# Altium PCB ESCV2.PcbDoc
Units mm, origin at the board's own origin, x right, y up, seen from the top; angles counter-clockwise.
Board outline 38.86 x 29.46 mm, 2 copper layers (L1, L2), stack 1.671 mm thick; 59 components, 37 nets, 154 pads, 23 vias.
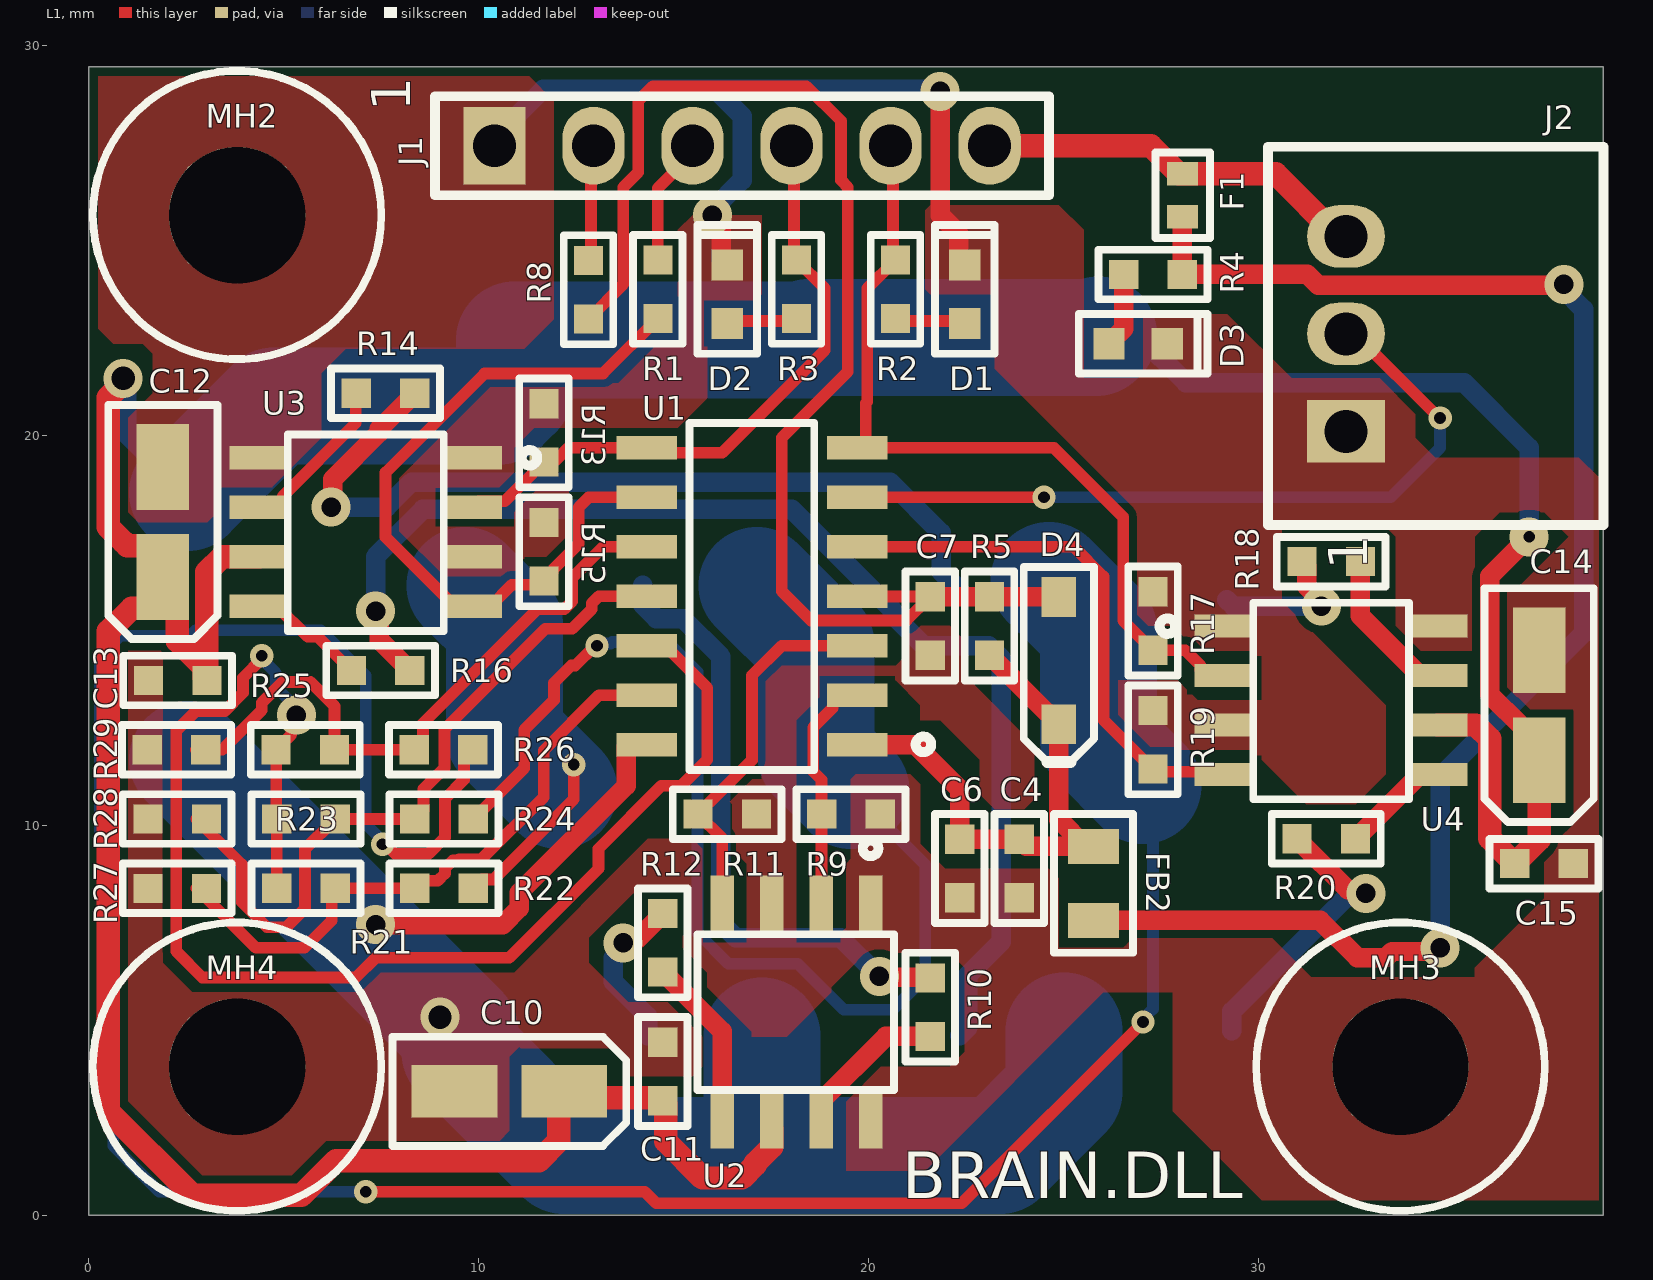
[diagram p0: L1 view]
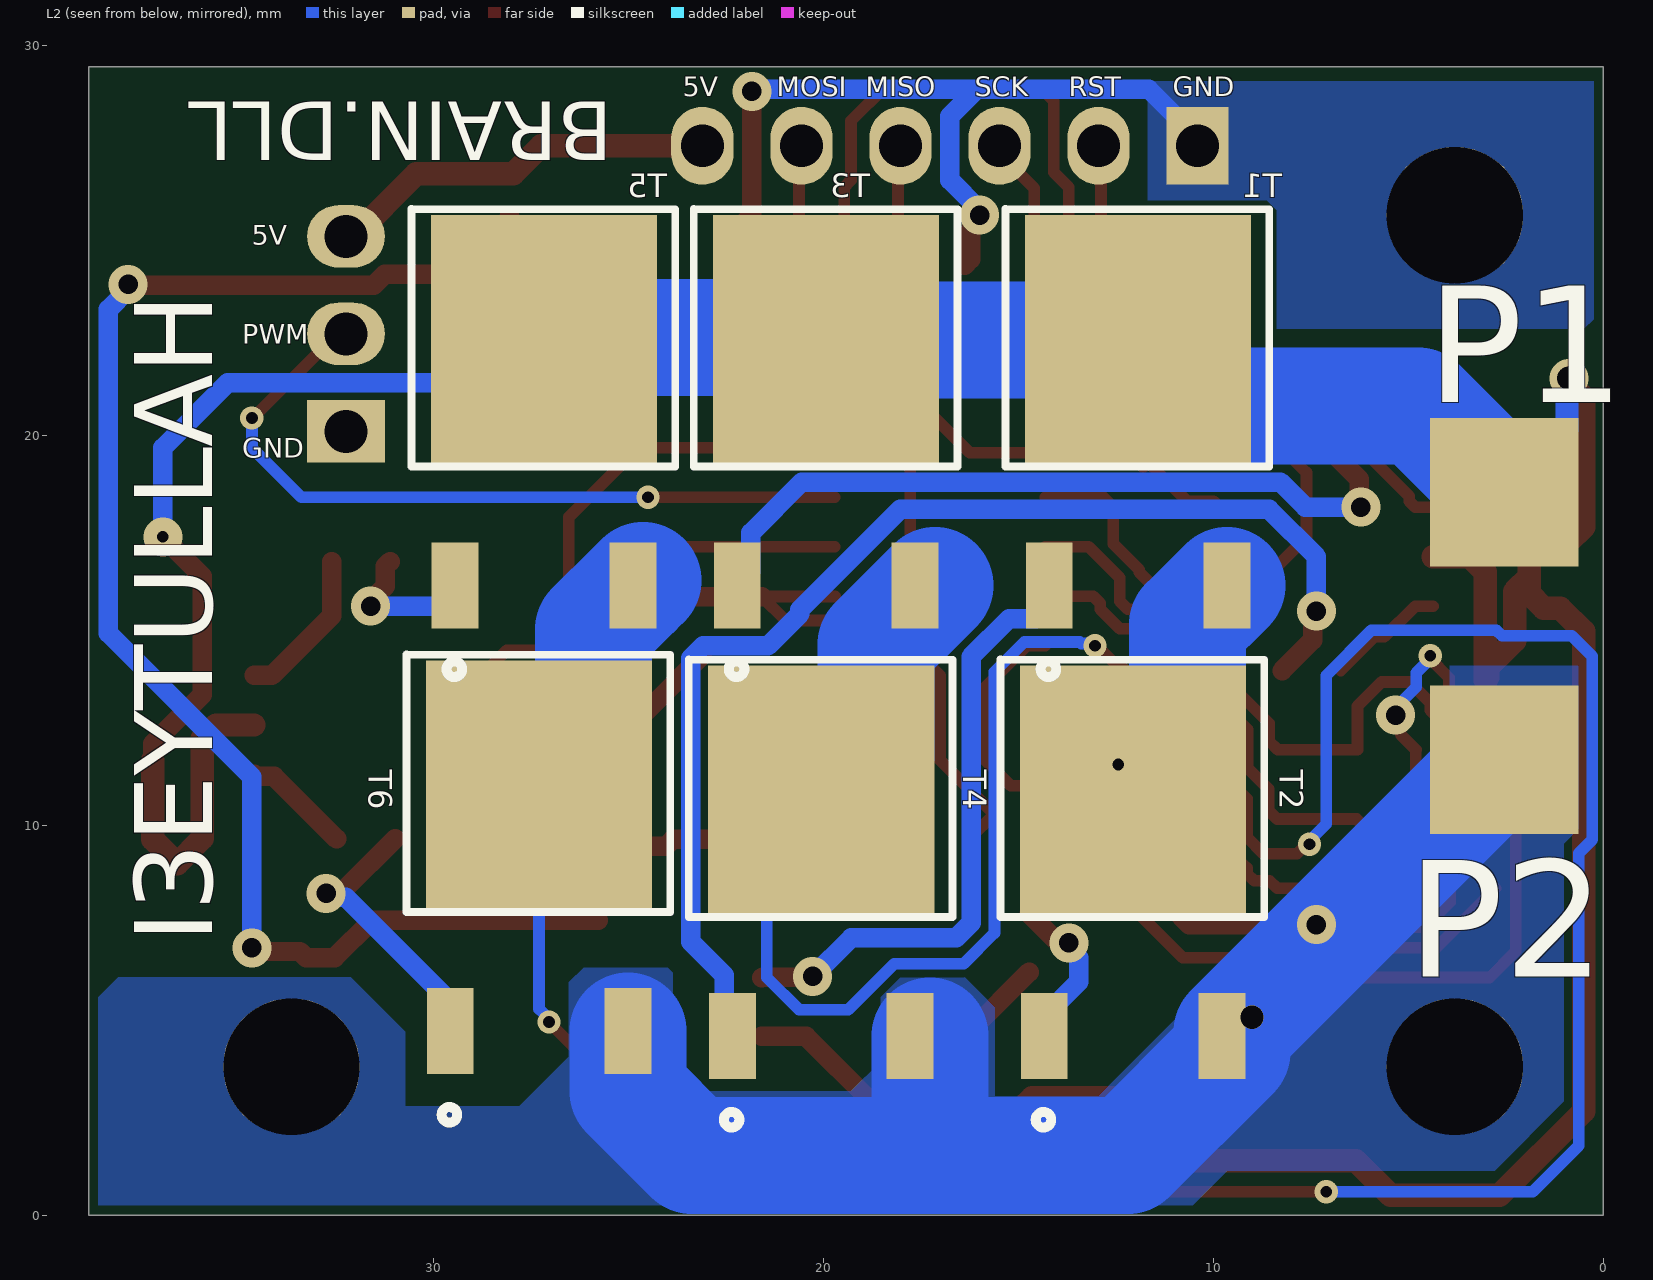
[diagram p1: L2 view, seen from below]
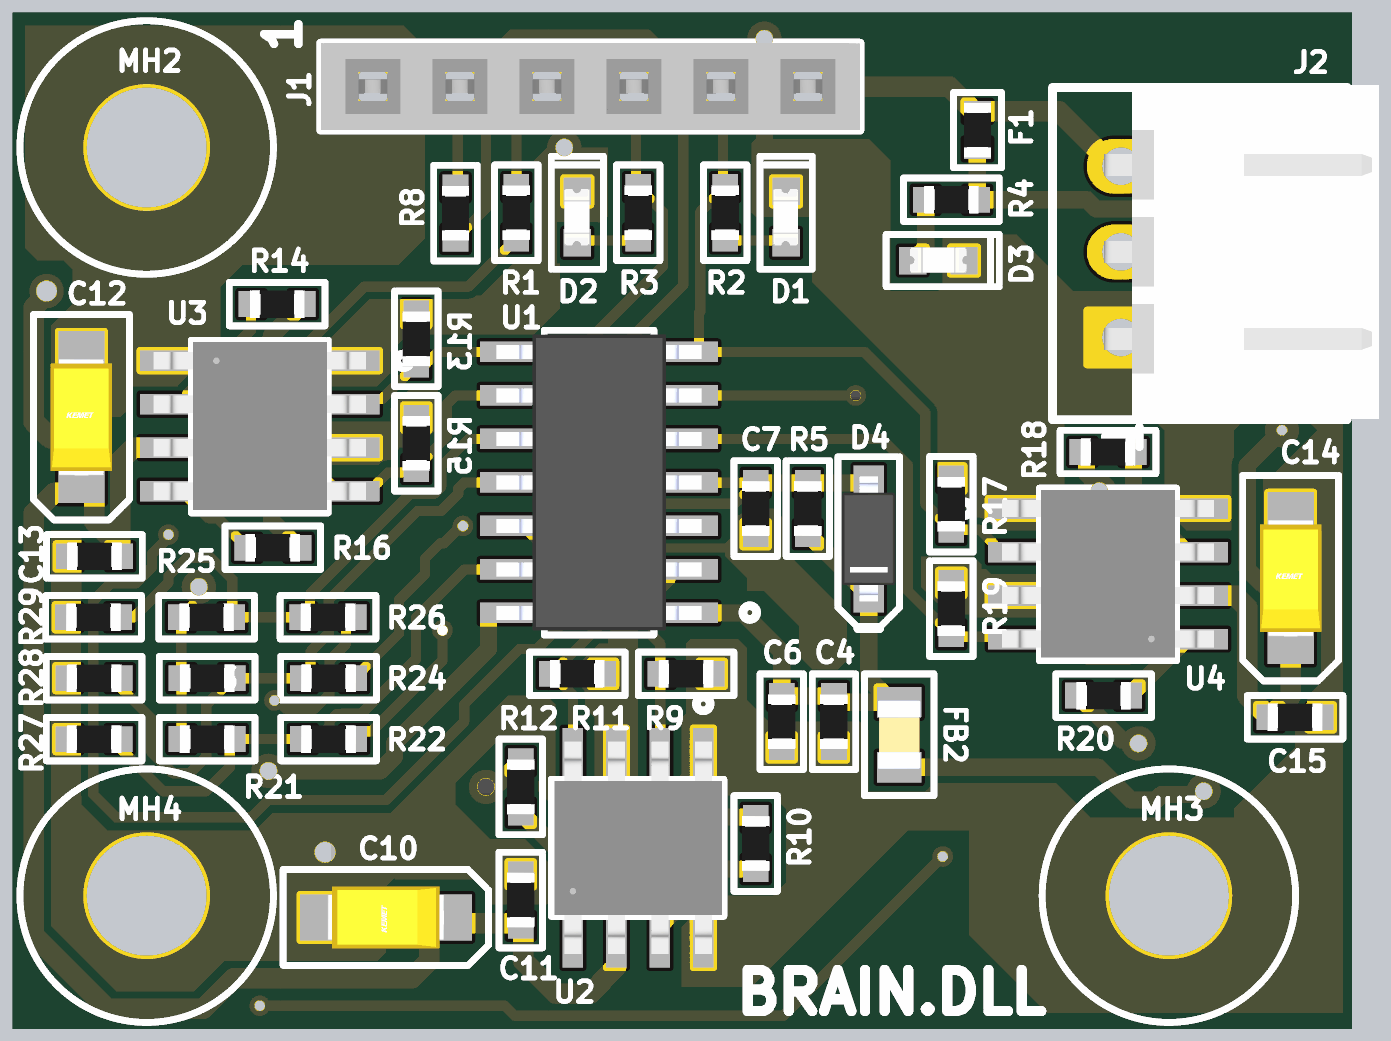
[diagram p2: 3D render of the assembled board from above, using the file's embedded part models]
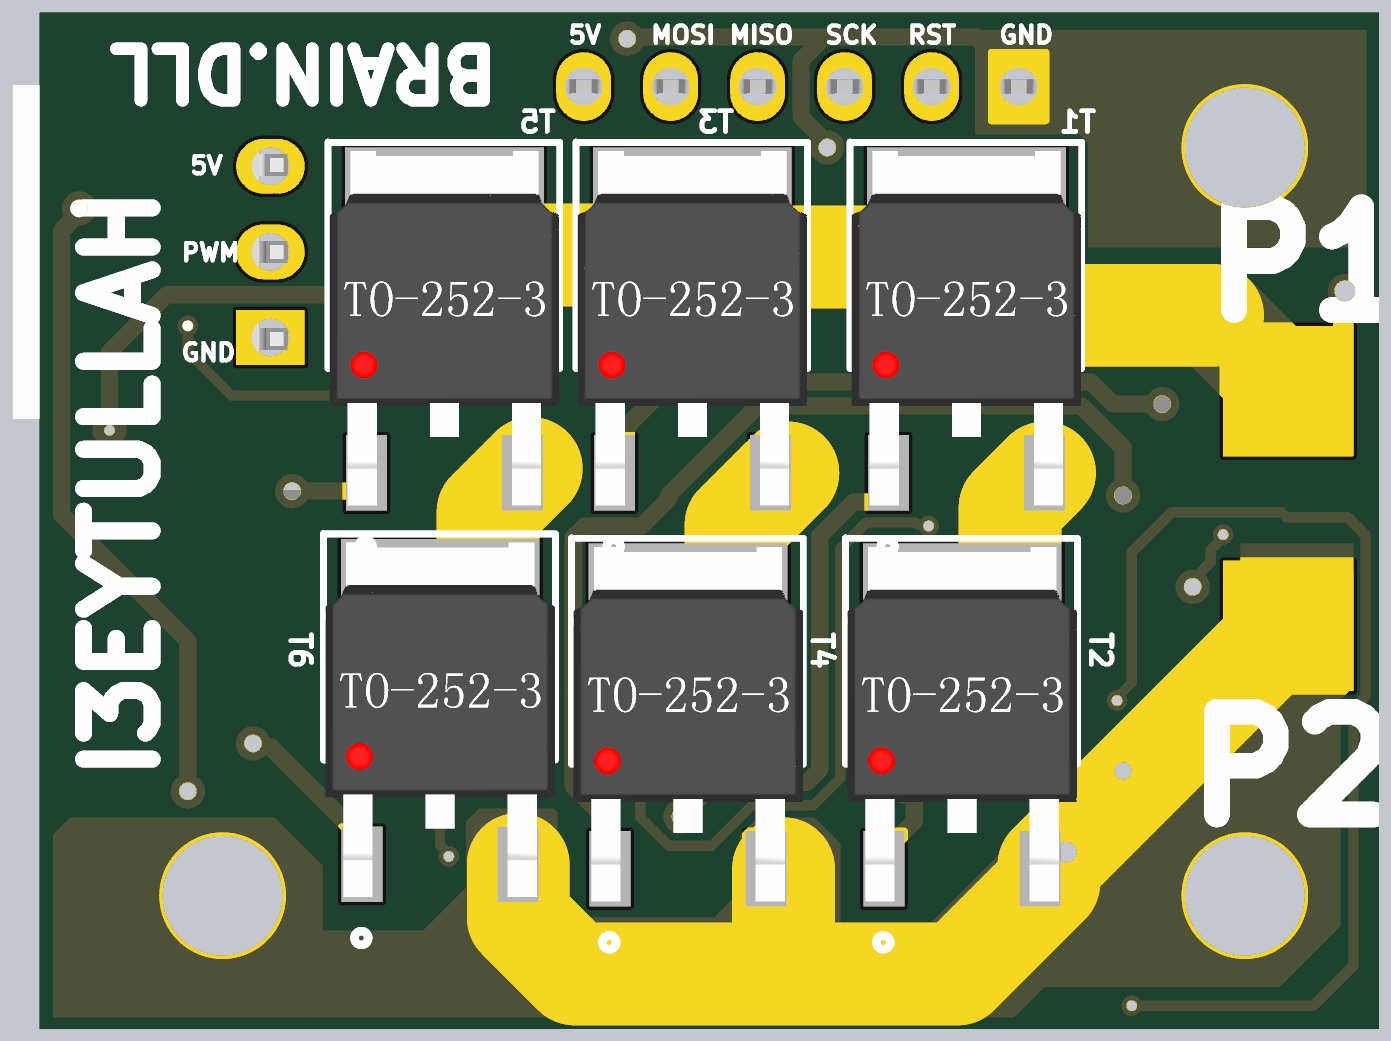
[diagram p3: 3D render of the assembled board from below, using the file's embedded part models]

## Layer stack, top to bottom
Top Solder: solder mask 0.0102, Solder Resist, Dk 3.5
L1: signal copper 0.0356
Dielectric 1: dielectric 1.6, FR-4, Dk 4.8
L2: signal copper 0.0356
Bottom Solder: solder mask 0.0102, Solder Resist, Dk 3.5

## Board outline
0,0 0,29.464 38.862,29.464 38.862,0

## Design rules (kind name [scope] priority, off if disabled: settings)
Clearance [All] p1: gap=0.2 ignorepadtopadclearanceinfootprint=FALSE
ComponentClearance [All] p1: gap=0.2 collisioncheckmode=3 verticalgap=0.2 showdistances=FALSE
HoleSize [All] p1: absolutevalues=TRUE maxlimit=10 minlimit=0.2 maxpercent=80.000 minpercent=20.000
HoleToHoleClearance [All] p1: gap=0.3 allowstackedmicrovias=TRUE
MinimumSolderMaskSliver [All] p1: minsoldermaskwidth=0.1
PolygonConnect [All] p1: connectstyle=Direct reliefconductorwidth=0.254 reliefentries=4 polygonreliefangle="90 Angle" airgapwidth=0.254
RoutingVias [All] p1: holewidth=0.3 width=0.6 viastyle="Through Hole" minholewidth=0.3 minwidth=0.6 maxholewidth=0.6 maxwidth=1
SilkToSilkClearance [All] p1: silktosilkclearance=0.1
SilkToSolderMaskClearance [IsPad] p1: minsilkscreentomaskgap=0 clearancetoexposedcopper=TRUE
SilkToSolderMaskClearance U3-ALL [IsPad] p2: minsilkscreentomaskgap=0.1 clearancetoexposedcopper=TRUE
SolderMaskExpansion [All] p1: expansion=0.1 istentingtop=FALSE
Width Width_POWER [InNet('+*') or InNet('GND') OR InNet('phase*')] p1: maxlimit=3 minlimit=0.3 preferedwidth=0.3
Width [All] p2: maxlimit=0.5 minlimit=0.3 preferedwidth=0.3
24 further rules are at their usual default settings.

## Classes and differential pairs
component class ESC2: C10 C11 C12 C13 C14 C15 J2 MH2 MH3 MH4 P1 P2 R9 R10 R11 R12 R13 R14 R15 R16 R17 R18 R19 R20 R21 R22 R23 R24 R25 R26 R27 R28 R29 T1 T2 T3 T4 T5 T6 U2 U3 U4
component class ESC1: C4 C6 C7 D1 D2 D3 D4 F1 FB2 J1 R1 R2 R3 R4 R5 R8 U1

## Components (designator, comment, footprint, x,y, rotation, side; value= is the part's Value field where it differs from the comment)
C4 "10uF" Z0603 23.876,8.89 r90 top
C6 "100nF" Z0603 22.352,8.89 r90 top
C7 "100nF" Z0603 21.59,15.113 r90 top
C10 "1uF" "1206 TANTAL CAP" 10.795,3.175 r180 top
C11 "100nF" Z0603 14.732,3.683 r90 top
C12 "1uF" "1206 TANTAL CAP" 1.905,17.78 r90 top
C13 "100nF" Z0603 2.286,13.716 r180 top
C14 "1uF" "1206 TANTAL CAP" 37.211,13.081 r90 top
C15 "100nF" Z0603 37.338,9.017 r0 top
D1 "GREEN" LED-0603 22.479,23.622 r270 top
D2 "BLUE" LED-0603 16.383,23.622 r270 top
D3 "RED" LED-0603 26.924,22.352 r180 top
D4 "SS0540_R1_00001" SOD-123 24.892,14.224 r90 top
F1 "FSMD075-0603RZ" F-0603 28.067,26.162 r270 top
FB2 "LCB2012-110Y-N" C0805 25.781,8.509 r90 top
J1 "HEADER-FEMALE-1X6-2.54mm" FEMALE-1X6-2.54MM 10.414,27.432 r90 top
J2 "2.50 mm" L-KLS1-XL4-2.50-03-R 32.258,22.606 r90 top
MH2 "MH_7.4MMC_3.2MMD" MH_7.4MMC_3.2MMD_NON_COPPER_NPLT 3.81,25.654 r0 top
MH3 "MH_7.4MMC_3.2MMD" MH_7.4MMC_3.2MMD_NON_COPPER_NPLT 33.655,3.81 r0 top
MH4 "MH_7.4MMC_3.2MMD" MH_7.4MMC_3.2MMD_NON_COPPER_NPLT 3.81,3.81 r0 top
P1 "PAD" SQARE_PAD 2.54,18.542 r180 bottom
P2 "PAD" SQARE_PAD 2.54,11.684 r180 bottom
R1 "22R" Z0603 14.605,23.749 r270 top
R2 "1K" Z0603 20.701,23.749 r90 top
R3 "1K" Z0603 18.161,23.749 r90 top
R4 "1K" Z0603 27.305,24.13 r0 top
R5 "10K" Z0603 23.114,15.113 r270 top
R8 "100R" Z0603 12.827,23.737 r270 top
R9 "4K7" Z0603 19.558,10.287 r180 top
R10 "100R" Z0603 21.59,5.334 r270 top
R11 "4K7" Z0603 16.383,10.287 r180 top
R12 "100R" Z0603 14.732,6.985 r270 top
R13 "4K7" Z0603 11.684,20.066 r270 top
R14 "100R" Z0603 7.62,21.082 r180 top
R15 "4K7" Z0603 11.684,17.018 r270 top
R16 "100R" Z0603 7.493,13.97 r180 top
R17 "4K7" Z0603 27.305,15.24 r270 top
R18 "100R" Z0603 31.877,16.764 r0 top
R19 "4K7" Z0603 27.305,12.192 r270 top
R20 "100R" Z0603 31.75,9.652 r0 top
R21 "33K" Z0603 5.576,8.382 r0 top
R22 "33K" Z0603 9.12,8.382 r0 top
R23 "33K" Z0603 5.576,10.16 r0 top
R24 "33K" Z0603 9.12,10.16 r0 top
R25 "33K" Z0603 5.561,11.938 r0 top
R26 "33K" Z0603 9.105,11.938 r0 top
R27 "10K" Z0603 2.274,8.382 r180 top
R28 "10K" Z0603 2.274,10.16 r180 top
R29 "10K" Z0603 2.259,11.938 r180 top
T1 "IRLR7843TRPBF" TO-252-3 11.938,19.304 r90 bottom
T2 "IRLR7843TRPBF" TO-252-3 12.065,7.747 r90 bottom
T3 "IRLR7843TRPBF" TO-252-3 19.939,19.304 r90 bottom
T4 "IRLR7843TRPBF" TO-252-3 20.066,7.747 r90 bottom
T5 "IRLR7843TRPBF" TO-252-3 27.178,19.304 r90 bottom
T6 "IRLR7843TRPBF" TO-252-3 27.305,7.874 r90 bottom
U1 "ATTINY24A-SSU" SOIC14 17.018,15.875 r180 top
U2 "TC427COA" SOIC-8#1 18.161,5.207 r270 top
U3 "TC427COA" SOIC-8#2 7.112,17.526 r180 top
U4 "TC427COA" SOIC-8#1 31.877,13.208 r0 top

## Footprints (in the part's own frame and the unit in brackets; to place one, negate y for a bottom-side part, rotate by r counter-clockwise, add the part's x,y. Pads: shape width x height; smd on the part's side, far side on the other; paste and mask are expansions set on the pad)
"1206 TANTAL CAP" [mm]
  rect 2.2x1.35 smd: 1(-1.41,0) 2(1.41,0)
  silkscreen extent -3,-1.4 3,1.4, body extent -1.7,-0.9 1.7,0.9, height 1.82
C0805 [mm]
  rect 0.9x1.3 smd: 1(-0.95,0) 2(0.95,0)
  silkscreen extent -1.78,-1.02 1.78,1.02, body extent -1,-0.63 1,0.63, height 0.7
F-0603 [mm]
  rect 0.6x0.8 smd: 1(-0.55,0) 2(0.55,0)
  silkscreen extent -1.1,-0.7 1.1,0.7, body extent -0.8,-0.4 0.8,0.4, height 0.46
FEMALE-1X6-2.54MM [mm]
  rect 2x1.6 hole 1.1: 1(0,0)
  oval 2x1.6 hole 1.1: 2(0,-2.54) 3(0,-5.08) 4(0,-7.62) 5(0,-10.16) 6(0,-12.7)
  silkscreen extent -1.27,-14.22 1.27,1.52, body extent -1.27,-14.22 1.27,1.52, height 8.8
L-KLS1-XL4-2.50-03-R [mm]
  rect 1.6x2 hole 1.1: 1(-2.5,0)
  oval 1.6x2 hole 1.1: 2(0,0) 3(2.5,0)
  silkscreen extent -4.9,-6.6 4.8,2, body extent -4.88,-7.53 4.88,0.5, height 5.85
LED-0603 [mm]
  rect 0.8x0.8 smd: 1(-0.75,0) 2(0.75,0)
  silkscreen extent -1.78,-0.76 1.52,0.76, body extent -0.82,-0.38 0.82,0.35, height 0.68
MH_7.4MMC_3.2MMD_NON_COPPER_NPLT [mm]
  round 3.5 hole 3.5: 1(0,0)
  silkscreen extent -3.7,-3.7 3.7,3.7
SOD-123 [mm]
  rect 1.02x0.88 smd: 1(-1.635,0) 2(1.635,0)
  silkscreen extent -2.6,-0.9 2.4,0.9, body extent -1.83,-0.77 1.83,0.77, height 1.46
SOIC14 [mm]
  rect 1.55x0.6 smd: 1(-2.7,3.81) 2(-2.7,2.54) 3(-2.7,1.27) 4(-2.7,0) 5(-2.7,-1.27) 6(-2.7,-2.54) 7(-2.7,-3.81) 8(2.7,-3.81) 9(2.7,-2.54) 10(2.7,-1.27) 11(2.7,0) 12(2.7,1.27) 13(2.7,2.54) 14(2.7,3.81)
  silkscreen extent -4.6,-4.44 1.6,4.45, body extent -3,-4.32 3,4.32, height 1.76
SOIC-8#1 [mm]
  rect 1.52x0.6 smd: 1(-2.74,1.905) 2(-2.74,0.635) 3(-2.74,-0.635) 4(-2.74,-1.905) 5(2.74,-1.905) 6(2.74,-0.635) 7(2.74,0.635) 8(2.74,1.905)
  silkscreen extent -4.4,-2.54 2,2.5, body extent -3.1,-2.45 3.1,2.45, height 1.76
SOIC-8#2 [mm]
  rect 1.52x0.6 smd: 1(-2.74,-1.905) 2(-2.74,-0.635) 3(-2.74,0.635) 4(-2.74,1.905) 5(2.74,1.905) 6(2.74,0.635) 7(2.74,-0.635) 8(2.74,-1.905)
  silkscreen extent -4.4,-2.5 2,2.54, body extent -3.1,-2.45 3.1,2.45, height 1.76
SQARE_PAD [mm]
  rect 3.81x3.81 smd paste-2539.97 mask+0.102: 1(0,0)
TO-252-3 [mm]
  rect 2.2x1.2 smd: 1(-3.15,2.28) 3(-3.15,-2.28)
  rect 6.4x5.8 smd: 2(3.15,0)
  silkscreen extent -5.5,-3.36 6.51,3.4, body extent -4.1,-3.35 6.25,3.35, height 2.41
Z0603 [mm]
  rect 0.75x0.75 smd: 1(-0.75,0) 2(0.75,0)
  silkscreen extent -1.4,-0.64 1.4,0.64, body extent -0.8,-0.4 0.8,0.4, height 0.46

## Part data
C4: library part CL10A106KP8NNNC, "Cap Ceramic 10uF 10V X5R 10% Pad SMD 0603 85C T/R", Case Code (Metric)=1608, Case Code (Imperial)=0603, Dielectric=X5R, Manufacturer=Samsung, Max Operating Temperature=85°C, Min Operating Temperature=-55°C, Package Quantity=1, Supplier Part Number 1=5232459, Tolerance=10%, Voltage Rating=10V, Capacitance=10uF, Case/Package=0603, Category="Ceramic Capacitors", ComponentLink4Description=OZDISAN_LINK, ComponentLink4URL=https://ozdisan.com/Product/Detail/350863/CL10A106KP8NNNC, Construction=Flat, Contact Plating=Tin, Depth=0.8mm, Height=0.8mm, Lead Free="Lead Free", Length=1.6mm, Manufacturer Part Number=CL10A106KP8NNNC, Material=Ceramic, Mount="Surface Mount", OZDISAN_PRICE="0.60 TRY", Packaging="Tape and Reel", Pricing 1="4000=0,03170, 8000=0,02840, 12000=0,02830, 20000=0,02810, 40000=0,02790 (USD)", Radiation Hardening=No, RoHS=Yes, RoHS Compliant=Yes, Series=CL, Stock 1=202000, Supplier 1="Future Electronics", Thickness=0.035inch, Voltage Rating (DC)=10V, Width=0.031inch
C6 C7 C11 C13 C15: library part CL10B104KB8NNNC, "Multi Layer Ceramic Capacitor (MLCC) / Cap Ceramic 0.1uF 50V X7R 10% Pad SMD 0603 125¡ãC T/R", Case Code (Metric)=1608, Case Code (Imperial)=0603, Dielectric=X7R, Manufacturer=Samsung, Max Operating Temperature=125°C, Min Operating Temperature=-55°C, Package Quantity=1, Supplier Part Number 1=7665443, Tolerance=10%, Voltage=50V, Capacitance=100nF, Case/Package=0603, Category="Ceramic Capacitors", ComponentLink4Description=OZDISAN_LINK, ComponentLink4URL=https://ozdisan.com/pasif-komponentler/kondansatorler/smt-smd-ve-mlcc-kondansatorler/CL10B104KB8NNNC, Construction=Flat, Contact Plating=Tin, Depth=0.8mm, Height=0.8mm, Lead Free="Lead Free", Length=1.6mm, Manufacturer Part Number=CL10B104KB8NNNC, Material=Ceramic, Mount="Surface Mount", OZDISAN_PRICE="0.05 TRY", Packaging="Tape and Reel", Pricing 1="4000=0,00800, 8000=0,00800, 16000=0,00800, 24000=0,00700, 40000=0,00600, 4000=0,00600, 8000=0,00600, 16000=0,00600, 24000=0,00500, 40000=0,00400 (USD)", Radiation Hardening=No, RoHS=Yes, RoHS Compliant=Yes, Series=CL, Stock 1=17024000, Supplier 1=RSComponents, Thickness=0.035inch, Voltage Rating=50V, Voltage Rating (DC)=50V, Width=0.031inch
C10 C12 C14: library part T491A105K035AT, "Cap Tant Solid 1uF 35V A CASE 10% (3.2 X 1.6 X 1.6mm) SMD 3216-18 7.5 Ohm 125 C T/R", Case Code (Metric)=3216, Case Code (Imperial)=1206, Dielectric Material=Tantalum, ESR (Equivalent Series Resistance)=7.5R, Leakage Current=500nA, Manufacturer=KEMET, Max Operating Temperature=125°C, Min Operating Temperature=-55°C, Package Quantity=1, Ripple Current=100mA, Supplier Part Number 1=399-8265-1-ND, Tolerance=20%, Voltage=25V, Voltage Rating=35V, Capacitance=1uF, Case/Package=1206, Category="Tantalum Capacitors", ComponentLink12Description=OZDISAN_LINK, ComponentLink12URL=https://ozdisan.com/pasif-komponentler/kondansatorler/tantal-kondansatorler/T491A105K035AT, Depth=1.6mm, Dissipation Factor=4%, Failure Rate=0.001%, Features="General Purpose", Height=1.6mm, Height - Seated (Max)=0.071inch, Lead Free="Lead Free", Length=3.2mm, Life (Hours)=2000Hour, Manufacturer Part Number=T491A105K035AT, Mount="Surface Mount,PCB", Number of Pins=2, OZDISAN_PRICE="1.78 TRY", Packaging="Tape and Reel", Polarity=Polar, Pricing 1="1=0,53000, 10=0,37100, 50=0,26000, 100=0,22290, 500=0,16716, 1000=0,14115 (USD)", Radiation Hardening=No, REACH SVHC="No SVHC", RoHS=Yes, RoHS Compliant=Yes, Stock 1=48, Supplier 1=Digi-Key, Termination=SMD/SMT, Voltage Rating (DC)=35V, Width=1.6mm
D1: library part HL-PST-1608U51GC, Case-Package=0603, ComponentLink1Description=OZDISAN_LINK, ComponentLink1URL=https://ozdisan.com/Product/Detail/471660/HL-PST-1608U51GC, OZDISAN_PRICE="0.22 TRY"
D2: library part 27-21/B7C-ZR1S1N/3C, Case-Package=0603, ComponentLink1Description=OZDISAN_LINK, ComponentLink1URL=https://ozdisan.com/led-ve-aydinlatma-cozumleri/led-komponentler/sinyal-ledler-renkli/27-21B7C-ZR1S1N3C, OZDISAN_PRICE="1,46 TRY"
D3: library part LTST-C190KRKT, "0603 red led alingap 631nm-639nm water clear 18-180mcd 130d", Case Code (Metric)=1608, Case Code (Imperial)=0603, Color=Red, Forward Current=30mA, Forward Voltage=2.4V, Lens Color=Colorless, Manufacturer="Vishay Lite-On", Max Operating Temperature=85°C, Min Operating Temperature=-55°C, Package Quantity=1, Power Dissipation=75mW, Reverse Voltage=5V, Supplier Part Number 1=160-1436-1-ND, Test Current=20mA, Case/Package=0603, Category=LEDs, ComponentLink10Description=OZDISAN_LINK, ComponentLink10URL=https://ozdisan.com/led-ve-aydinlatma-cozumleri/led-komponentler/sinyal-ledler-renkli/LTST-C190KRKT, Depth=0.8mm, Dominant Wavelength=631nm, Height=0.8mm, Lead Free="Lead Free", Length=1.6mm, Lens Style=Diffused,Colorless,Clear,Rectangular, Lens Transparency=Clear, Luminous Intensity=54mcd, Manufacturer Part Number=LTST-C190KRKT, Mount="Surface Mount", Number of Elements=1, Number of LEDs=1, Number of Pins=2, OZDISAN_PRICE="0.38 TRY", Packaging="Tape and Reel", Power Rating=75mW, Pricing 1="1=0,24000, 10=0,13200, 100=0,06110, 500=0,05640, 1000=0,04418, 2000=0,04324 (USD)", Radiation Hardening=No, RoHS=Yes, RoHS Compliant=Yes, Stock 1=874288, Supplier 1=Digi-Key, Viewing Angle=130°, Wavelength=639nm, Width=0.8mm, Illumination Color=Red
D4: "Diode Schottky 40V 0.5A 2-Pin SOD-123 T/R", Manufacturer="Pan Jit", Max Operating Temperature=125°C, Max Repetitive Reverse Voltage (Vrrm)=40V, Min Operating Temperature=-55°C, Peak Non-Repetitive Surge Current=5.5A, Supplier Part Number 1=3757-SS0540_R1_00001CT-ND, Category="Rectifier Diodes", ComponentLink3Description=OZDISAN_LINK, ComponentLink3URL=https://ozdisan.com/guc-yari-iletkenleri/diyotlar-modul-diyotlar-ve-dogrultucular/schottky-diyotlar/SS0540R100001, Element Configuration=Single, Manufacturer Part Number=SS0540_R1_00001, Mount="Surface Mount", OZDISAN_PRICE="0.55 TRY", Pricing 1="1=0,29000, 10=0,23400, 100=0,12410, 500=0,08168, 1000=0,05554 (USD)", Radiation Hardening=No, RoHS=Yes, RoHS Compliant=Yes, Stock 1=6025, Supplier 1=Digi-Key
F1: Case-Package=0603, Current Rating=0.75, Max Voltage=6V, ComponentLink1Description=OZDISAN_LINK, ComponentLink1URL=https://ozdisan.com/guc-yari-iletkenleri/devre-koruyucu-komponentler/ptc-sigortalar/FSMD075-0603RZ, OZDISAN_PRICE="3.16 TRY"
FB2: Case-Package=0603, ComponentLink1Description=OZDISAN_LINK, ComponentLink1URL=https://ozdisan.com/pasif-komponentler/induktorler/bead-feritler/LCB2012-110Y-N, OZDISAN_PRICE="0,22 TRY"
J1: library part PPPC061LFBN-RC, "CONN HDR 6POS 0.1 GOLD PCB", Color=Black, Manufacturer=Sullins, Package Quantity=1000, Supplier Part Number 1=S7039-ND, Category=Connectors, ComponentLink1Description=https://media.digikey.com/pdf/Data%20Sheets/Sullins%20PDFs/Female_Headers.100_DS.pdf?src-supplier=Digi-Key, ComponentLink1URL=https://media.digikey.com/pdf/Data%20Sheets/Sullins%20PDFs/Female_Headers.100_DS.pdf?src-supplier=Digi-Key, Connector Type=Header,Socket, Contact Material=Bronze, Contact Plating=Gold, Height=8.5mm, Housing Material=Plastic, Lead Free="Lead Free", Length=15.7mm, Manufacturer Part Number=PPPC061LFBN-RC, Mount="Through Hole", Number of Positions=6, Number of Rows=1, Packaging=Bulk, Pitch=0.1inch, Pricing 1="1=0,53000, 10=0,46500, 80=0,38300, 440=0,33300, 1000=0,27472, 5000=0,24142, 10000=0,24050 (USD)", RoHS=Yes, Stock 1=33601, Supplier 1=Digi-Key, Termination=Solder, Width=2.5mm
J2: library part L-KLS1-XL4-2.50-03-R, ComponentLink1Description=OZDISAN_LINK, ComponentLink1URL=https://ozdisan.com/konnektor-ve-baglanti-elemanlari/konnektor-cesitleri/pcb-konnektorler/L-KLS1-XL4-2-50-03-R, OZDISAN_PRICE="0,27 TRY"
MH2 MH3 MH4: library part MH_7.4MMNC_3.2MMD, "Mounting Hole 7.4 mm Diameter (Non Copper), 3.2 mm Drill NPTH"
P1 P2: library part SQARE_PAD
R1: library part MC0603SAF220JT5E, "MULTICOMP         MC0603SAF220JT5E            RESISTOR, THICK FILM, 22OHM, 100mW, 1%", Case Code (Metric)=1608, Case Code (Imperial)=0603, Manufacturer=Multicomp, Power Rating=100mW, Resistance Tolerance=1%, Resistor Type="Thick Film", Supplier Part Number 1=79M5934, Temperature Coefficient=100ppm/°C, Voltage Rating=75V, Case/Package=0603, Category=Resistors, ComponentLink2Description=OZDISAN_LINK, ComponentLink2URL=https://ozdisan.com/pasif-komponentler/direncler/smt-smd-ve-cip-direncler/0603SAF220JT5E, Manufacturer Part Number=MC0603SAF220JT5E, Number of Pins=2, OZDISAN_PRICE="0.02 TRY", Packaging="Cut Tape", REACH SVHC=Unknown, Resistance=22R, RoHS=Yes, RoHS Compliant=Yes, Supplier 1=Newark, Tolerance=1%, Voltage Rating (DC)=75V
R2 R3 R4: library part MC0603SAF1001T5E, "MULTICOMP - MC0603SAF1001T5E - THICK FILM RESISTOR, 1KOHM, 100mW, 1%", Case Code (Metric)=1608, Case Code (Imperial)=0603, Manufacturer=Multicomp, Power Rating=100mW, Resistance=1kR, Resistance Tolerance=1%, Resistor Type="Thick Film", Supplier Part Number 1=1632391, Temperature Coefficient=100ppm/°C, Voltage Rating=75V, Case/Package=0603, Category=Resistors, ComponentLink2Description=OZDISAN_LINK, ComponentLink2URL=https://ozdisan.com/pasif-komponentler/direncler/smt-smd-ve-cip-direncler/0603SAF1001T5E, Manufacturer Part Number=MC0603SAF1001T5E, OZDISAN_PRICE="0.02 TRY", Packaging="Cut Tape", Pricing 1="1=0,00890, 10=0,00810, 100=0,00730, 1000=0,00390 (GBP)", REACH SVHC=Unknown, RoHS=Yes, RoHS Compliant=Yes, Stock 1=340, Supplier 1=Farnell, Tolerance=1%, Voltage Rating (DC)=75V
R5 R27 R28 R29: library part CQ03SAF1002T5E, Case-Package=0603, ComponentLink1Description=OZDISAN_LINK, ComponentLink1URL=https://ozdisan.com/pasif-komponentler/direncler/smt-smd-ve-cip-direncler/CQ03SAF1002T5E, OZDISAN_PRICE="0.03 TRY"
R8 R10 R12 R14 R16 R18 R20: library part 0603SAJ0101T5E, Case-Package=0603, ComponentLink1Description=OZDISAN_LINK, ComponentLink1URL=https://ozdisan.com/pasif-komponentler/direncler/smt-smd-ve-cip-direncler/0603SAJ0101T5E, OZDISAN_PRICE="0.02 TRY"
R9 R11 R13 R15 R17 R19: library part MC0603SAF4701T5E, "RES, THICK FILM, 4K7, 1%, 0.1W, 0603; Resistance: 4.7kohm; Resistance Tolerance: ± 1%; Power Rating: 100mW; Resistor...", Case Code (Metric)=1608, Case Code (Imperial)=0603, Manufacturer=Multicomp, Power Rating=100mW, Resistance=4.7kR, Resistance Tolerance=1%, Resistor Type="Thick Film", Supplier Part Number 1=1632439, Temperature Coefficient=100ppm/°C, Voltage Rating=75V, Case/Package=0603, Category=Uncategorized, ComponentLink2Description=OZDISAN_LINK, ComponentLink2URL=https://ozdisan.com/pasif-komponentler/direncler/smt-smd-ve-cip-direncler/0603SAF4701T5E, Manufacturer Part Number=MC0603SAF4701T5E, Number of Pins=2, OZDISAN_PRICE="0.02 TRY", Packaging="Cut Tape", Pricing 1="1=0,00890, 10=0,00810, 100=0,00730, 1000=0,00400 (GBP)", REACH SVHC=Unknown, RoHS=Yes, RoHS Compliant=Yes, Supplier 1=Farnell, Tolerance=1%, Voltage Rating (DC)=75V
R21 R22 R23 R24 R25 R26: library part RI0603L3302FT, Case-Package=0603, ComponentLink1Description=OZDISAN_LINK, ComponentLink1URL=https://ozdisan.com/pasif-komponentler/direncler/smt-smd-ve-cip-direncler/TC0325B3302T5C, OZDISAN_PRICE="0.09 TRY"
T1 T2 T3 T4 T5 T6: "MOSFET, 30V, 161A, 3.3 mOhm, 34 nC Qg, Logic Level, D-Pak", Case/Package=DPAK, Continuous Drain Current (ID)=161A, Drain to Source Breakdown Voltage=30V, Drain to Source Resistance=3.3mR, Drain-source On Resistance-Max=3.3MR, Gate to Source Voltage (Vgs)=20V, Manufacturer="International Rectifier", Max Operating Temperature=175°C, Max Power Dissipation=140W, Min Operating Temperature=-55°C, Package Quantity=1, Supplier Part Number 1=70017418, Input Capacitance=4.38nF, Category=MOSFETs, ComponentLink1Description=OZDISAN_LINK, ComponentLink1URL=https://www.ozdisan.com/guc-yari-iletkenleri/mosfetler/mosfet-discrete/IRLR7843TRPBF, Current Rating=161A, Drain to Source Voltage (Vdss)=30V, Element Configuration=Single, Fall Time=19ns, Height=2.39mm, Lead Free="Lead Free", Length=6.73mm, Manufacturer Part Number=IRLR7843TRPBF, Mount="Surface Mount", Nominal Vgs=2.3V, Number of Elements=1, Number of Pins=3, On-State Resistance=3.3MR, OZDISAN_PRICE="14,41 TRY", Packaging="Cut Tape", Power Dissipation=140W, Radiation Hardening=No, Rds On Max=3.3mR, REACH SVHC="No SVHC", Rise Time=42ns, RoHS=Yes, RoHS Compliant=Yes, Series=HEXFET®, Supplier 1="Allied Electronics", Turn-Off Delay Time=34ns, Turn-On Delay Time=25ns, Voltage Rating (DC)=30V, Width=6.22mm
U1: library part ATTINY24A-SSUR, "MCU 8-bit ATtiny AVR RISC 2KB Flash 2.5V/3.3V/5V 14-Pin SOIC W T/R", Case/Package=SOIC, Frequency=20MHz, Manufacturer="Microchip / Atmel", Max Operating Temperature=85°C, Max Supply Voltage=5.5V, Min Operating Temperature=-40°C, Min Supply Voltage=1.8V, Package Quantity=1, Supplier Part Number 1=6049728, Category=Microcontrollers, ComponentLink1Description=OZDISAN_LINK, ComponentLink1URL=https://ozdisan.com/entegre-devreler-ics/embedded-entegreler/mikroislemciler/ATTINY24A-SSU, Contact Plating=Tin,Matte, Core Architecture=AVR, Data Bus Width=8b, Lead Free="Lead Free", Manufacturer Part Number=ATTINY24A-SSUR, Max Frequency=20MHz, Memory Size=2KB, Memory Type=FLASH, Mount="Surface Mount", Number of Pins=14, Number of Programmable I/O=12, Number of Timers/Counters=2, Number of I/Os=12, Oscillator Type=Internal, OZDISAN_PRICE=35,93, Packaging="Tape and Reel", Peripherals="Brown-out Detect/Reset,POR,PWM,WDT,Temp Sensor", Radiation Hardening=No, RAM Size=128B, REACH SVHC="No SVHC", RoHS=Yes, Series="AVR® ATtiny", Supplier 1="Future Electronics", Watchdog Timer=Yes, Interface=SPI
U2 U3 U4: "IC MOSFET DVR 1.5A DUAL HS 8SOIC", Case/Package=SOIC, Manufacturer=Microchip, Max Operating Temperature=70°C, Max Output Current=1.5A, Max Power Dissipation=470mW, Max Supply Current=8mA, Max Supply Voltage=18V, Min Operating Temperature=0°C, Min Supply Voltage=4.5V, Operating Supply Voltage=16V, Package Quantity=100, Supplier Part Number 1=TC427COA-ND, Category="Gate Drivers", ComponentLink5Description=OZDISAN_LINK, ComponentLink5URL=https://ozdisan.com/entegre-devreler-ics/guc-entegreleri/guc-surucu-entegreleri/TC427COA, Fall Time=30ns, Height=1.42mm, Lead Free="Lead Free", Length=4.9mm, Manufacturer Part Number=TC427COA, Mount="Surface Mount", Nominal Supply Current=8mA, Number of Drivers=2, Number of Outputs=2, Number of Pins=8, Output Impedance=6R, OZDISAN_PRICE="20,56 TRY", Packaging=Rail/Tube, Power Dissipation=470mW, Pricing 1="1=1,45000, 25=1,19800, 100=1,08120 (USD)", Propagation Delay=75ns, Radiation Hardening=No, REACH SVHC="No SVHC", Rise Time=30ns, RoHS=Yes, RoHS Compliant=Yes, Series=-, Stock 1=562, Supplier 1=Digi-Key, Supply Current=8mA, Turn-On Delay Time=75ns, Width=3.91mm

## Via types
v1: diameter 1, hole 0.5, L1 to L2, tented both sides, 11 vias
v2: diameter 0.6, hole 0.3, L1 to L2, tented both sides, 7 vias
v3: diameter 1/0.6 (per signal layer), hole 0.6, L1 to L2, tented top, 1 vias
v4: diameter 1, hole 0.5, L1 to L2, tented top, 1 vias
v5: diameter 0.6, hole 0.3, L1 to L2, tented top, 1 vias
v6: diameter 1, hole 0.6, L1 to L2, tented both sides, 1 vias
v7: diameter 1, hole 0.3, L1 to L2, tented both sides, 1 vias

## Nets (pads, with @x,y where several pads share a name; then routed paths per layer and width w, separated by ;. In a path a pad name is that pad's centre, name@x,y a point inside that pad or via, vN(x,y) a via of type N, cw(c..) or ccw(c..) an arc to the next point about the centre after c; other vN are vias at no path point)
+5V: F1.1 J1.6 J2.3 | length 10.1
  L1 w0.6: J1.6 27.247,27.432 27.967,26.712 F1.1 30.452,26.712 32.058,25.106 J2.3
+5VCC: F1.2 FB2.1 R4.2 | length 39.5
  L1 w0.5: FB2.1 31.595,7.559 32.55,6.604 33.282,6.604 33.44,6.762 34.575,6.762 v1(34.671,6.858) ; F1.2 28.061,25.606 28.061,24.136 R4.2 31.266,24.13 31.54,23.856 37.826,23.856 v1(37.846,23.876)
  L2 w0.5: v1(34.671,6.858) 34.671,11.244 38.354,14.927 38.354,23.233 37.846,23.741 v1(37.846,23.876)
+VCC: C4.2 C6.2 D4.1 FB2.2 R5.2 U1.1 | length 13.9
  L1 w0.5: U1.1 21.209,12.065 22.352,10.922 C6.2 C4.2 24.057,9.459 FB2.2@25.581,9.459 ; R5.2 24.628,12.849 24.702,12.849 24.892,12.659 D4.1 24.892,10.148 FB2.2@25.581,9.459 ; FB2.2 FB2.2@25.581,9.459
+VMN: C10.1 C11.1 C12.1 C13.1 C14.1 C15.1 P1.1 T1.2 T3.2 T5.2 U2.6 U3.6 U4.6 | length 107.5
  L1 w0.5: v7(36.957,17.399) 35.941,16.383 35.941,13.35 36.35,12.941 36.366,12.941 37.211,12.096 C14.1
  L1 w0.6: v6(0.889,21.463) 0.889,21.355 0.508,20.974 0.508,17.653 0.889,17.272 0.991,17.17 1.53,17.17 1.905,16.795 C12.1 ; U3.6 3.429,16.891 3.036,16.498 C13.1 2.961,13.791 2.961,14.057 2.28,14.738 2.28,15.995 C12.1 ; U2.6@17.526,2.213 17.526,1.753 17.102,1.329 17.102,1.292 16.763,0.953 15.749,0.953 14.807,1.895 14.807,2.858 14.657,3.008 12.372,3.008 C10.1 12.065,3.035 12.065,1.905 11.557,1.397 6.35,1.397 5.461,0.508 2.667,0.508 0.508,2.667 0.508,14.973 1.105,15.57 1.53,15.57 1.905,15.945 C12.1 ; U4.6 35.59,12.573 35.941,12.222 35.941,9.664 C15.1 37.211,9.64 C14.1
  L2 w0.5: T5.2@26.924,22.581 28.149,21.356 35.286,21.356 36.957,19.685 v7(36.957,17.399)
  L2 w0.6: v6(0.889,21.463) 0.935,21.417 0.935,20.147 P1.1
  L2 w3: P1.1 4.752,20.754 10.538,20.754 10.922,21.138 10.922,22.454 T1.2 18.415,22.454 18.479,22.518 25.845,22.518 T5.2@25.908,22.581
A0: R21.2 R22.1 R27.1 U1.13 | length 16.1
  L1 w0.3: R27.1@2.77,8.382 4.294,6.858 5.539,6.858 6.238,7.557 6.238,8.294 R21.2 R22.1 8.567,8.579 8.96,8.579 9.145,8.764 9.145,8.902 9.35,9.107 9.488,9.107 9.505,9.124 10.078,9.124 11.676,10.721 11.676,11.918 13.093,13.335 U1.13
A1: R23.2 R24.1 R28.1 U1.11 | length 18.7
  L1 w0.3: R28.1@2.77,10.16 3.937,8.993 3.937,8.026 4.579,7.384 5.073,7.384 5.551,7.862 5.551,9.385 R23.2 R24.1 8.595,10.385 8.595,10.933 9.13,11.468 9.13,12.458 11.715,15.043 12.411,15.043 12.909,15.541 12.909,15.699 13.085,15.875 U1.11
A2: R25.2 R26.1 R29.1 U1.10 | length 16.5
  L1 w0.3: R29.1@2.755,11.938 3.429,11.938 4.445,12.954 4.445,13.14 4.982,13.677 5.686,13.677 6.311,13.052 R25.2 R26.1 8.58,12.163 8.58,12.615 11.508,15.543 12.204,15.543 12.409,15.748 12.409,16.346 13.208,17.145 U1.10
AH: R9.2 U1.2 U2.2 | length 6.5
  L1 w0.3: U2.2@18.796,7.693 18.802,7.699 18.802,10.287 18.802,11.17 18.593,11.379 18.593,12.51 19.093,13.01 19.093,13.185 19.243,13.335 U1.2
AIN0: R21.1 R23.1 R25.1 U1.12 | length 35.8
  L1 w0.3: v2(4.445,14.351) 4.445,14.27 3.963,13.788 3.963,13.398 3.493,12.928 2.754,12.928 2.249,12.422 2.249,6.768 2.921,6.096 6.858,6.096 7.366,6.604 10.795,6.604 13.081,8.89 13.081,9.398 14.695,11.012 15.203,11.012 15.875,11.684 15.875,13.523 14.793,14.605 U1.12 ; R21.1 R23.1 4.819,10.168 4.819,11.93 R25.1 5.2,12.327 5.2,12.693 v1(5.334,12.827)
  L2 w0.3: v2(4.445,14.351) 4.445,14.27 4.802,13.913 4.802,13.548 5.334,13.016 v1(5.334,12.827)
AL: R11.2 U1.3 U2.4 | length 10
  L1 w0.3: U2.4@16.256,7.693 16.256,9.664 R11.2 17.018,11.672 17.018,13.843 17.78,14.605 U1.3
BL: R1.2 R15.2 U1.9 U3.4 | length 19.5
  L1 w0.3: U1.9 12.827,18.415 12.573,18.161 12.573,17.217 11.909,16.553 11.909,16.493 11.584,16.168 10.859,16.168 10.312,15.621 9.392,15.621 7.62,17.393 7.62,19.05 10.16,21.59 13.196,21.59 R1.2
CL: R19.2 U1.5 U4.4 | length 14
  L1 w0.3: U1.5 25.273,17.145 26.035,16.383 26.035,12.712 R19.2 27.374,11.372 29.068,11.372 U4.4
GND: C4.1 C6.1 C7.1 C10.2 C11.2 C12.2 C13.2 C14.2 C15.2 D1.1 D2.1 D3.1 J1.1 J2.1 MH2.1 MH3.1 MH4.1 P2.1 R9.1 R11.1 R13.1 R15.1 R17.1 R19.1 R27.2 R28.2 R29.2 T2.3 T4.3 T6.3 U1.14 U2.1 U2.3 U2.8 U3.1 U3.3 U3.8 U4.1 U4.3 U4.8 | length 65
  L1 w0.5: v4(7.366,7.454) 10.629,7.454 11.049,7.874 11.049,8.271 13.793,11.015 13.793,12.015 13.843,12.065 U1.14 ; v1(16.002,25.654) 16.002,25.519 16.233,25.288 16.233,24.522 D2.1 ; v1(21.844,28.829) 21.844,25.654 22.329,25.169 22.329,24.522 D1.1
  L2 w0.5: J1.1 10.414,27.632 11.664,28.882 16.076,28.882 ; v1(16.002,25.654) 16.002,25.789 16.764,26.551 16.764,28.194 16.076,28.882 ; v1(21.844,28.829) 21.791,28.882 16.076,28.882
  L2 w2: MH4.1 MH4.1@3.81,4.216 ; MH2.1 MH2.1@4.216,25.654
  L2 w3: P2.1 9.531,4.693 9.531,4.185 12.192,1.524 17.272,1.524 ; T4.3@17.278,4.597 17.278,1.53 17.272,1.524 ; T6.3 25.025,3.172 23.377,1.524 17.272,1.524
  other v3: 9.017,5.08
MISO/BH: J1.4 R3.2 R13.2 U1.8 U3.2 | length 16.5
  L1 w0.3: U3.2 10.002,18.311 10.679,18.311 R13.2 11.811,19.189 12.307,19.685 U1.8 14.445,19.558 16.256,19.558 18.886,22.188 18.886,23.774 R3.2 18.098,24.563 18.098,27.368 J1.4
MOSI/CH: J1.5 R2.2 R17.2 U1.7 U4.2 | length 21.6
  L1 w0.3: U1.7 U1.7@19.789,19.685 ; J1.5 20.637,27.368 20.637,24.563 R2.2 19.976,23.774 19.976,20.865 19.939,20.828 19.939,19.835 U1.7@19.789,19.685 ; U4.2 28.677,13.843 28.527,13.993 28.527,14.093 28.13,14.49 R17.2 26.543,15.252 26.543,17.907 24.765,19.685 U1.7@19.789,19.685
NetD1_2: D1.2 R2.1 | length 1.8
  L1 w0.3: R2.1 20.765,22.935 22.415,22.935 D1.2
NetD2_2: D2.2 R3.1 | length 1.8
  L1 w0.3: D2.2 16.447,22.935 18.097,22.935 R3.1
NetD3_2: D3.2 R4.1 | length 1.9
  L1 w0.5: D3.2 26.555,22.733 R4.1
NetR10_1: R10.1 T1.1 | length 15.8
  L1 w0.5: v1(20.286,6.121) 20.305,6.103 21.571,6.103 R10.1
  L2 w0.5: T1.1 14.218,15.654 14.568,15.304 15.243,15.304 16.221,14.326 16.221,7.498 16.607,7.112 19.296,7.112 v1(20.286,6.121)
NetR10_2: R10.2 U2.7 | length 3.9
  L1 w0.5: U2.7 18.796,2.927 20.453,4.584 R10.2
NetR12_1: R12.1 T2.1 | length 4.2
  L1 w0.5: v1(13.716,6.985) 13.812,7.081 14.078,7.081 R12.1
  L2 w0.5: v1(13.716,6.985) 13.716,6.85 13.462,6.596 13.462,5.98 14.345,5.097 T2.1
NetR12_2: R12.2 U2.5 | length 4.7
  L1 w0.5: R12.2 16.256,4.711 U2.5@16.256,2.213
NetR14_1: R14.1 T3.1 | length 21.9
  L1 w0.5: v1(6.223,18.161) 6.269,18.207 6.269,18.883 7.458,20.071 7.458,20.17 R14.1
  L2 w0.5: v1(6.223,18.161) 7.646,18.161 8.289,18.804 20.566,18.804 21.869,17.501 21.869,16.508 T3.1@22.352,16.025
NetR14_2: R14.2 U3.7 | length 4.2
  L1 w0.3: U3.7 4.832,18.161 4.982,18.311 4.982,18.444 6.858,20.32 6.858,21.07 R14.2
NetR16_1: R16.1 T4.1 | length 31.6
  L1 w0.5: v1(7.366,15.494) 7.462,15.398 7.462,14.751 R16.1
  L2 w0.5: v1(7.366,15.494) 7.366,16.891 8.579,18.104 18.045,18.104 20.616,15.533 20.616,15.421 21.433,14.604 23.095,14.604 23.416,14.283 23.416,7.016 22.552,6.152 22.552,4.803 T4.1
NetR16_2: R16.2 U3.5 | length 3.1
  L1 w0.3: U3.5 4.832,15.621 5.62,14.833 5.88,14.833 R16.2
NetR18_1: R18.1 T5.1 | length 3.8
  L1 w0.5: R18.1 31.252,16.639 31.252,16.127 31.623,15.756 v1(31.623,15.621)
  L2 w0.5: T5.1@29.204,15.781 29.364,15.621 v1(31.623,15.621)
NetR18_2: R18.2 U4.7 | length 4
  L1 w0.5: R18.2 32.627,15.373 34.157,13.843 U4.7
NetR20_1: R20.1 T6.1 | length 7.5
  L1 w0.3: R20.1@30.994,9.646 R20.1
  L1 w0.5: R20.1 32.301,8.351 32.67,8.351 v1(32.766,8.255)
  L2 w0.5: T6.1@29.331,4.724 29.331,5.224 32.266,8.159 32.67,8.159 v1(32.766,8.255)
NetR20_2: R20.2 U4.5 | length 2.8
  L1 w0.5: R20.2 34.101,11.253 34.567,11.253 U4.5
phaseA: R22.2 T1.3 T2.2 | length 10.7
  L1 w0.3: R22.2 10.095,8.607 10.385,8.607 12.446,10.668 v5(12.446,11.557)
  L2 w3: T1.3 10.665,15.147 10.665,12.297 T2.2
phaseB: R24.2 T3.3 T4.2 | length 34.3
  L1 w0.3: R24.2 11.176,11.466 11.176,12.446 11.938,13.208 11.938,13.651 12.386,14.099 12.488,14.099 12.994,14.605 v2(13.043,14.605)
  L2 w0.3: v2(13.043,14.605) 13.1,14.662 13.392,14.662 13.434,14.704 14.853,14.704 15.621,13.936 15.621,7.239 16.413,6.447 18.191,6.447 19.37,5.268 20.635,5.268 21.463,6.096 21.463,8.992 T4.2@19.558,10.897
  L2 w3: T3.3@17.151,16.154 18.666,14.639 18.666,11.789 T4.2@19.558,10.897
phaseC: R26.2 T5.3 T6.2 | length 71.1
  L1 w0.3: v2(7.112,0.597) 14.269,0.597 14.563,0.303 22.401,0.303 v2(27.051,4.953) ; v2(7.542,9.51) 7.624,9.51 7.863,9.271 8.726,9.271 9.145,9.69 9.145,10.68 9.63,11.165 9.63,11.713 R26.2
  L2 w0.3: v2(7.112,0.597) 1.816,0.597 0.635,1.778 0.635,9.284 0.285,9.634 0.285,14.333 0.811,14.859 2.604,14.859 2.746,15.001 5.954,15.001 7.112,13.843 7.112,10.033 7.485,9.66 7.485,9.567 v2(7.542,9.51) ; T5.3@24.898,16.281 T5.3@24.898,16.781 ; v2(27.051,4.953) 27.051,5.034 27.305,5.288 T6.2
  L2 w3: T5.3@24.644,16.281 24.871,16.054 25.905,15.02 25.905,12.17 T6.2@27.051,11.024
PWM_IN: J2.2 U1.6 | length 19.5
  L1 w0.3: U1.6 v2(24.511,18.415) ; J2.2 32.485,22.606 34.644,20.447 v2(34.671,20.447)
  L2 w0.3: v2(24.511,18.415) 33.401,18.415 34.671,19.685 v2(34.671,20.447)
R\E\S\E\T\: C7.2 D4.2 R5.1 R8.2 U1.4 | length 34.2
  L1 w0.3: R8.2 13.716,23.876 13.716,26.368 14.104,26.756 14.104,28.582 14.478,28.956 18.415,28.956 19.304,28.067 19.304,26.543 19.476,26.371 19.476,21.635 17.78,19.939 17.78,16.002 18.527,15.255 20.982,15.255 C7.2 21.584,15.869 19.724,15.869 U1.4 U1.4@19.715,15.872
  L1 w0.5: C7.2 R5.1 23.116,15.861 24.89,15.861 D4.2
R\E\S\E\T\_N: J1.2 R8.1 | length 3
  L1 w0.3: R8.1 12.89,24.55 12.89,27.368 J1.2
SCK: J1.3 R1.1 | length 3.3
  L1 w0.3: R1.1 14.605,26.343 15.494,27.232 J1.3

## Polygon pours and split planes (outlines as drawn)
GND on L1 "NONET_L-01_P-001" (solid, pour order 0): 13.589,21.336 14.732,22.479 15.113,22.479 15.113,25.273 15.494,25.654 17.272,25.654 17.272,23.622 17.018,23.368 15.875,23.368 15.875,20.955 15.113,20.193 11.43,20.193 10.922,19.685 10.922,19.05 10.541,18.669 9.017,18.669 8.89,18.542 8.89,17.78 9.017,17.653 10.922,17.653 10.922,18.034 11.684,18.796 12.192,18.796 12.319,18.669 12.319,17.272 11.938,16.891 11.176,16.891 11.176,16.637 10.922,16.383 9.017,16.383 7.874,17.526 7.874,18.796 10.414,21.336
GND on L1 "NONET_L-01_P-001" (solid, pour order 2): 162 vertices, not listed, extent 1.016,0.381 38.735,25.908
GND on L1 "NONET_L-01_P-001" (solid, pour order 1): 11.938,28.575 11.303,29.21 0.254,29.21 0.254,22.733 0.635,22.352 1.397,22.352 1.651,22.098 1.651,21.082 1.016,20.447 1.016,18.034 1.27,17.78 3.048,17.78 3.302,18.034 3.302,18.669 4.826,18.669 5.969,19.812 5.969,21.59 6.604,22.225 11.176,22.225 11.938,22.987 11.938,24.257
GND on L2 "NONET_L-01_P-001" (solid, pour order 4): 0.508,22.733 8.382,22.733 8.382,25.781 8.636,26.035 11.684,26.035 11.684,29.083 0.254,29.083 0.254,22.987
GND on L2 "NONET_L-01_P-001" (solid, pour order 3): 0.635,14.097 0.635,9.906 1.016,9.525 1.016,2.921 2.794,1.143 9.652,1.143 10.541,0.254 38.608,0.254 38.608,5.588 38.1,6.096 32.131,6.096 30.734,4.699 30.734,2.794 27.813,2.794 26.543,4.064 26.543,5.969 26.162,6.35 24.003,6.35 23.876,6.223 23.876,5.461 23.6,5.185 23.6,3.175 19.304,3.175 18.542,3.937 18.542,5.588 18.034,6.096 16.383,6.096 15.621,5.334 15.621,3.048 12.954,3.048 3.937,12.065 3.937,14.097

## Silkscreen, mask and mechanical layers (free items; w line width, h text height)
Top Overlay:
  text "BRAIN.DLL" at 20.874,0.427 h1.2
Bottom Overlay:
  text "GND" at 11.049,28.702 h0.51
  text "RST" at 13.716,28.702 h0.51
  text "SCK" at 16.129,28.702 h0.51
  text "MISO" at 18.923,28.702 h0.51
  text "MOSI" at 21.209,28.702 h0.51
  text "5V" at 23.622,28.702 h0.51
  text "BRAIN.DLL" at 25.419,28.556 h1.5 r180
  text "5V" at 34.671,24.892 h0.51
  text "PWM" at 34.925,22.352 h0.51
  text "GND" at 34.925,19.431 h0.51
  text "I3EYTULLAH" at 35.687,6.985 h2 r270
Board Outline:
  lines w0.2: 0,0 0,29.5 38.9,29.5 38.9,0 0,0

## Text inside footprints (layer, text, board x,y; h text height)
J1: Top Overlay "1" at 8.255,28.321 h1 r90
J2: Top Overlay "1" at 32.804,16.56 h1 r90